# EAGLE board PiPowerRF (EAGLE 7.2.0)
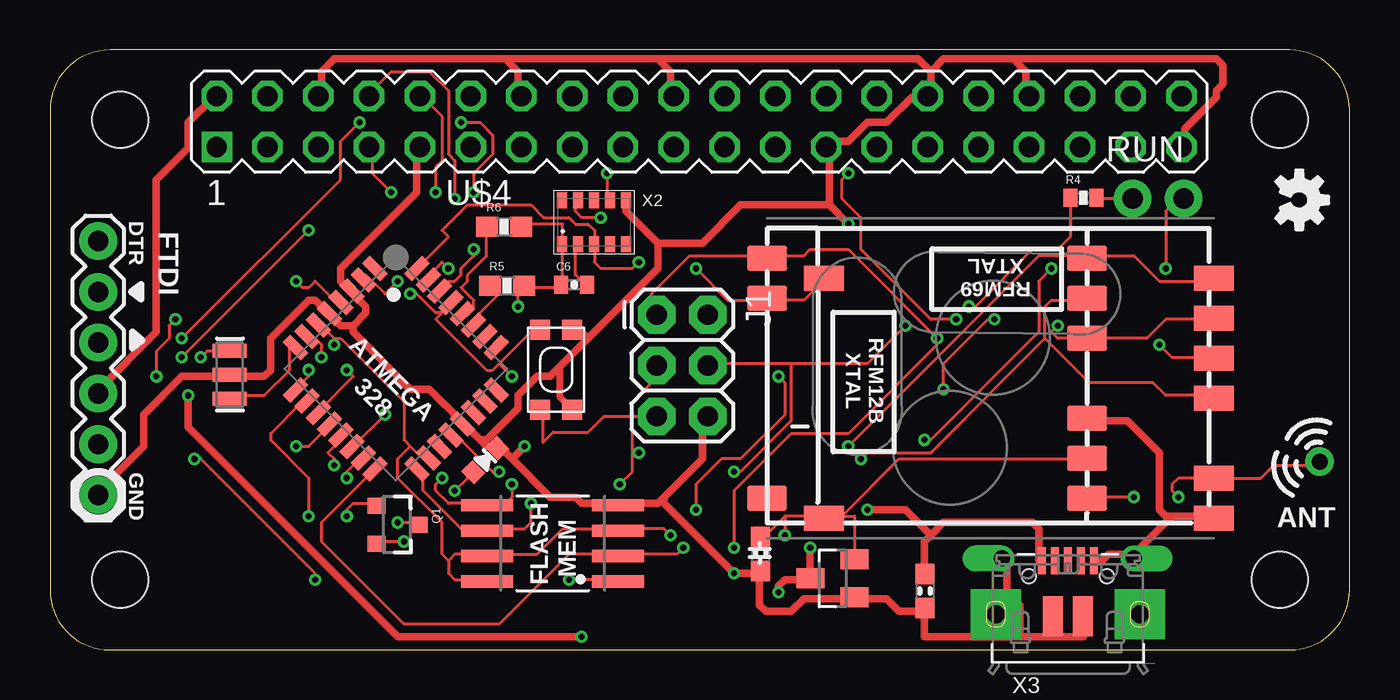
[diagram p0: board, top side]
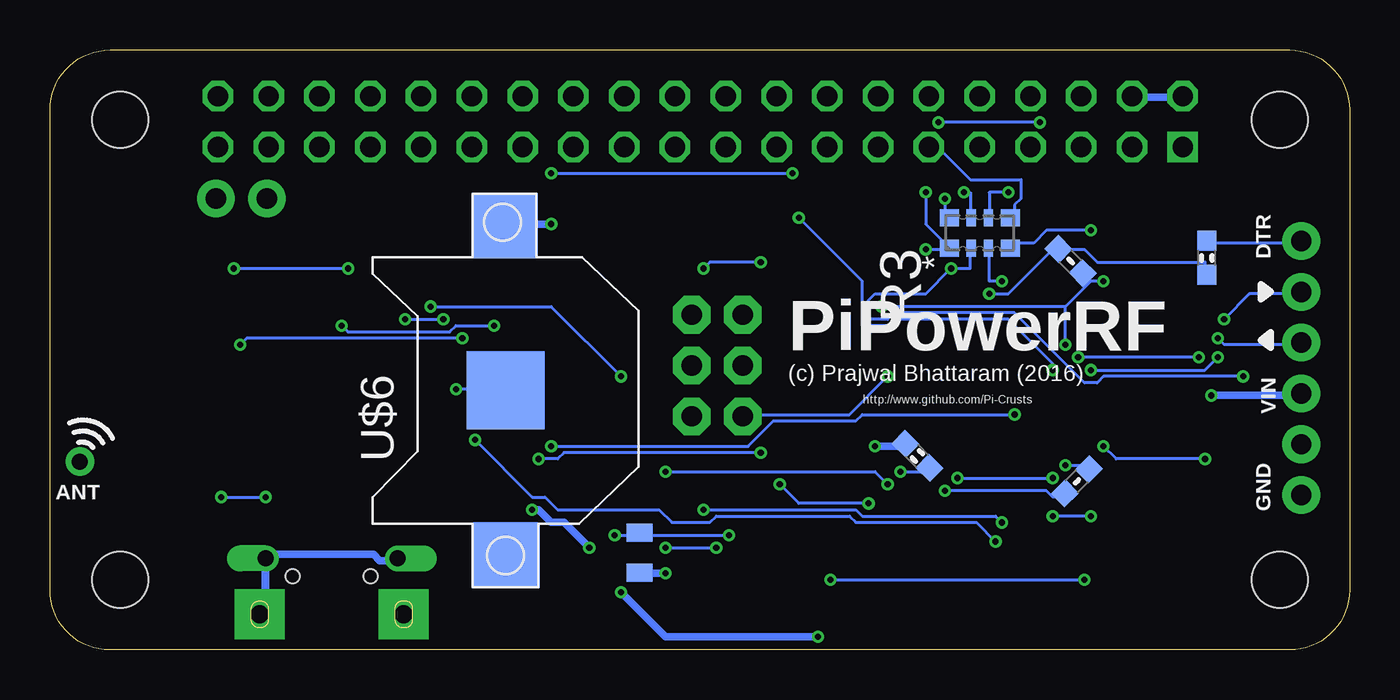
[diagram p1: board, bottom side, seen from below]

Size 65 x 30 mm. Coordinates in mm from the lower left corner, seen from the top.
Copper layers (1*16): Top 0.035mm / dielectric 1.5mm / Bottom 0.035mm
Design rules "ITEADstudio_DRC *": minimum track width 6mil, minimum drill 12mil, track to track 6mil, track to pad 6mil, pad to pad 6mil, via to via 6mil, smd to smd 0mil, copper to edge 10mil, drill to drill 10mil, minimum pad ring 10mil, minimum via ring 6mil, stop-mask expansion 2mil, vias tented up to drill 100mil, thermal gap 15mil
Net classes: 1 power: width 0.381 mm, clearance 0.254 mm
tRestrict: area 24.2,8.9 to 29,12.9; area 5.8,16.9 to 6.8,18.6; area 5.1,9.7 to 6.7,10.4
bRestrict: area 27.4,17.7 to 29.1,18.7; area 21,13.9 to 22.8,14.9; area 21.5,12.6 to 22,13.2; area 20.6,12.6 to 21.1,13.2; area 20.1,12.9 to 20.6,13.5; area 20,13.4 to 20.5,14.1; area 26.5,18.9 to 27,19.5; area 26.5,17.9 to 27,18.5; area 27.5,19.2 to 28,19.8; area 27.9,18.8 to 29,19.6

## Footprints (pad centres in the part's own frame; a part is rotated, then mirrored left to right if it is on the bottom)
TQFP32-08 = smd 1.27 x 0.533: 1 -4.293,2.8; 2 -4.293,2; 3 -4.293,1.2; 4 -4.293,0.4; 5 -4.293,-0.4; 6 -4.293,-1.2; 7 -4.293,-2; 8 -4.293,-2.8; 17 4.293,-2.8; 18 4.293,-2; 19 4.293,-1.2; 20 4.293,-0.4; 21 4.293,0.4; 22 4.293,1.2; 23 4.293,2; 24 4.293,2.8 | smd 0.533 x 1.27: 9 -2.8,-4.293; 10 -2,-4.293; 11 -1.2,-4.293; 12 -0.4,-4.293; 13 0.4,-4.293; 14 1.2,-4.293; 15 2,-4.293; 16 2.8,-4.293; 25 2.8,4.293; 26 2,4.293; 27 1.2,4.293; 28 0.4,4.293; 29 -0.4,4.293; 30 -1.2,4.293; 31 -2,4.293; 32 -2.8,4.293
0603-CAP = smd 1.016 x 0.965: 1 -0.85,0; 2 0.85,0
0805-CAP = smd 0.902 x 1.3: 1 -1,0; 2 1,0
0402-CAP = smd 0.7 x 0.9: 1 -0.65,0; 2 0.65,0
1X06 = drill 1.016 pad 1.88: 1 0,0; 2 2.54,0; 3 5.08,0; 4 7.62,0; 5 10.16,0; 6 12.7,0
SOT23 = smd 1 x 1.4: 1 -0.95,-1.1; 2 0.95,-1.1; 3 0,1.1
2X3 = drill 1.016 pad 1.88 octagon: 1 0,0; 2 0,2.54; 3 2.54,0; 4 2.54,2.54; 5 5.08,0; 6 5.08,2.54
SOT23-3 = smd 0.8 x 0.9: 1 -0.95,-1; 2 0.95,-1; 3 0,1.1
0603-RES = smd 1.016 x 0.965: 1 -0.85,0; 2 0.85,0
RESCAXE80P320X160X60-8N = smd 0.864 x 0.965: 1 -0.762,1.524; 4 -0.762,-1.524; 5 0.762,-1.524; 8 0.762,1.524 | smd 0.864 x 0.457: 2 -0.762,0.432; 3 -0.762,-0.432; 6 0.762,-0.432; 7 0.762,0.432
0402-RES = smd 0.7 x 0.9: 1 -0.65,0; 2 0.65,0
0603-RES' = smd 1.1 x 1: 1 -0.85,0; 2 0.85,0
RFM12B-MINPADS = smd 2 x 1.27: ANT 8,-6; GND 8,-2; IRQ -8,4; SCK 8,4; SDI 8,2; SDI1 -8.002,-6.001; SDO -8,6; SEL 8,6; VDD 8,-4
1X02_NO_SILK = drill 1.016 pad 1.88: 1 0,0; 2 2.54,0
KMR2 = smd 1 x 1: 1 2,0.8; 2 2,-0.8; 3 -2,0.8; 4 -2,-0.8
RFM12B-ANTENNA = drill 0.8 pad 1.422: P$1 0,0
0603-LED = smd 0.8 x 0.9: MINUS -0.85,0; PLUS 0.85,0
PIZERO_THOUGH_HOLE = drill 1.016 square: 1 8.34,25.15 | drill 1.016 octagon: 2 8.34,27.69; 3 10.88,25.15; 4 10.88,27.69; 5 13.42,25.15; 6 13.42,27.69; 7 15.96,25.15; 8 15.96,27.69; 9 18.5,25.15; 10 18.5,27.69; 11 21.04,25.15; 12 21.04,27.69; 13 23.58,25.15; 14 23.58,27.69; 15 26.12,25.15; 16 26.12,27.69; 17 28.66,25.15; 18 28.66,27.69; 19 31.2,25.15; 20 31.2,27.69; 21 33.74,25.15; 22 33.74,27.69; 23 36.28,25.15; 24 36.28,27.69; 25 38.82,25.15; 26 38.82,27.69; 27 41.36,25.15; 28 41.36,27.69; 29 43.9,25.15; 30 43.9,27.69; 31 46.44,25.15; 32 46.44,27.69; 33 48.98,25.15; 34 48.98,27.69; 35 51.52,25.15; 36 51.52,27.69; 37 54.06,25.15; 38 54.06,27.69; 39 56.6,25.15; 40 56.6,27.69 | hole 2.8: 3.5,3.5; 3.5,26.5; 61.5,26.5; 61.5,3.5
RFM69W-MINPADS = smd 2 x 1.27: ANA 8,-5; DIO0 -11.5,5; GND 8,-7; MISO 8,1; MOSI 8,3; NSS 8,5; SCK 8,-1; VDD -11.5,-7
CR1220-SMD = smd 3.2 x 3.2: +$1 -8.2,0; +$2 8.2,0 | smd 3.9 x 3.9: - 0,0
SO08WIDE = smd 0.61 x 2.6: 1 -1.905,-3.269; 2 -0.635,-3.269; 3 0.635,-3.269; 4 1.905,-3.269; 5 1.905,3.286; 6 0.635,3.286; 7 -0.635,3.286; 8 -1.905,3.286
RESONATOR-SMD = smd 0.7 x 1.7: 1 -1.2,0; 2 0,0; 3 1.2,0
MC-RTC-C3 = smd 0.5 x 0.8: P$1 -1.6,-1.1; P$2 -0.8,-1.1; P$3 0,-1.1; P$4 0.8,-1.1; P$5 1.6,-1.1; P$6 1.6,1.1; P$7 0.8,1.1; P$8 0,1.1; P$9 -0.8,1.1; P$10 -1.6,1.1
4UCONN_20329_V2 = smd 1 x 2: BASE@1 -0.75,-2; BASE@2 0.75,-2 | smd 0.4 x 1.35: D+ 0,0.775; D- -0.65,0.775; GND 1.3,0.775; ID 0.65,0.775; VBUS -1.3,0.775 | drill 0.8 pad 1.2 offset: SPRT@1 -3.3,0.9; SPRT@2 3.3,0.9 | drill 0.9 pad 2.5 square: SPRT@3 -3.6,-1.9; SPRT@4 3.6,-1.9 | hole 0.7: -1.95,0; 1.95,0

## Placement (x,y rotation side)
ATMEGA328  ATMega-328  [TQFP32-08]  17.3,14.06 315 top
C1  0.1  [0603-CAP]  7.14,19.61 90 bottom
C2  1u  [0603-CAP]  43.76,2.95 270 top
C3  10u  [0805-CAP]  35.51,4.85 270 bottom
C4  0.1  [0603-CAP]  35.53,4.8 270 top
C5  0.1  [0603-CAP]  21.62,9.7 135 bottom
C6  47pF  [0402-CAP]  26.21,18.26 0 top
FTDI  FTDI  [1X06]  2.41,7.75 90 top
IC3  MCP1703CB  [SOT23]  39.14,3.58 90 top
J1  AVR_SPI_PRG_6PTH  [2X3]  30.35,16.76 270 top
Q1  MMBT2222A  [SOT23-3]  17.35,6.27 270 top
R1  10k  [0603-RES]  13.95,19.45 135 bottom
R2  1k5  [0603-RES]  13.64,8.43 45 bottom
R3  220R  [RESCAXE80P320X160X60-8N]  18.49,20.85 90 bottom
R4  100  [0402-RES]  51.69,22.61 0 top
R5  10K  [0603-RES']  22.86,18.21 0 top
R6  10K  [0603-RES']  22.71,21.16 0 top
RFM12B  RFM12B_MINPADS  [RFM12B-MINPADS]  43.87,13.59 0 top
RUN  [1X02_NO_SILK]  54.15,22.58 0 top
SW1  SPST_TACT-KMR2  [KMR2]  25.32,14.02 90 top
U$1  RFM12B_ANTENNA  [RFM12B-ANTENNA]  63.51,9.42 340 bottom
U$2  LED0603  [0603-LED]  21.77,9.5 225 top
U$3  [OSHW-LOGO-S]  62.48,22.5 270 top
U$4  PIZERO_THROUGH_HOLE  [PIZERO_THOUGH_HOLE]  0,0 0 top
U$5  RFM69  [RFM69W-MINPADS]  50.22,13.59 0 top
U$6  [CR1220-SMD]  42.21,12.98 90 bottom
W25X40CLSNIG-ND  AT25F512BWIDE_5.3MM  [SO08WIDE]  25.15,5.33 90 top
X1  16 MHz  [RESONATOR-SMD]  8.99,13.77 270 top
X2  MC-RTC-RV-1805-C3-I2C  [MC-RTC-C3]  27.2,21.39 0 top
X3  microUSB  [4UCONN_20329_V2]  50.9,3.68 0 top

## Library data of the parts
ATMEGA328 C1-C5 R1 R2 RFM12B U$1 U$2 U$5 W25X40CLSNIG-ND = LowPowerLab
C6 = SparkFun-Capacitors
FTDI J1 RUN = SparkFun-Connectors
IC3 = linear
Q1 = SparkFun-DiscreteSemi; PROD_ID: TRANS-08049
R3 = Panasonic-EXB-ERJ; MPN: EXB38V221JV; OC_FARNELL: 2060094; OC_NEWARK: 65T9093; PACKAGE: 0603; POWERRATING: 0.063 W/element; SUPPLIER: PANASONIC; TOLERANCE: ±5 %
R4 = SparkFun-Passives
R5 R6 = SparkFun-Resistors
SW1 U$6 = adafruit
U$3 = SparkFun-Aesthetics
U$4 = pizero
X1 = SparkFun
X2 = Microcrystal-RTC
X3 = microbuilder

## Nets
3.3V: J1.2
A0: ATMEGA328.23
A1: ATMEGA328.24
A2: ATMEGA328.25
A3: ATMEGA328.26
A4_SDA: ATMEGA328.27 R5.1
A5_SCL: ATMEGA328.28 R6.1
A6: ATMEGA328.19
A7: ATMEGA328.22
AREF: ATMEGA328.20 C5.1
D0_RX: ATMEGA328.30 FTDI.4 R3.1
D1_TX: ATMEGA328.31 FTDI.5 R3.2
D2: ATMEGA328.32 RFM12B.IRQ U$5.DIO0 X2.P$3
D3: ATMEGA328.1
D4: ATMEGA328.2 R3.3
D5: ATMEGA328.9 R3.4
D6: ATMEGA328.10 Q1.1
D7: ATMEGA328.11 X2.P$9
D8: ATMEGA328.12 W25X40CLSNIG-ND.1
D9: ATMEGA328.13 R2.2
D10_SS: ATMEGA328.14 RFM12B.SEL U$5.NSS
D11_MOSI: ATMEGA328.15 J1.4 RFM12B.SDI U$5.MOSI W25X40CLSNIG-ND.5
D12_MISO: ATMEGA328.16 J1.1 RFM12B.SDO U$5.MISO W25X40CLSNIG-ND.2
D13_SCK: ATMEGA328.17 J1.3 RFM12B.SCK U$5.SCK W25X40CLSNIG-ND.6
GND [power]: ATMEGA328.3 ATMEGA328.5 ATMEGA328.21 C2.2 C3.2 C4.2 C5.2 FTDI.1 IC3.1 J1.6 RFM12B.GND SW1.2 SW1.4 U$2.MINUS U$4.6 U$4.9 U$4.14 U$4.20 U$4.25 U$4.30 U$4.34 U$4.39 U$5.GND U$6.+$2 W25X40CLSNIG-ND.4 X1.2 X2.P$6 X3.BASE@1 X3.BASE@2 X3.GND X3.SPRT@1 X3.SPRT@2 X3.SPRT@3 X3.SPRT@4
GPIO4: R3.6 U$4.7
GPIO17: R3.5 U$4.11
N$1: ATMEGA328.7 X1.1
N$2: R2.1 U$2.PLUS
N$3: RFM12B.ANT U$1.P$1 U$5.ANA
N$4: R4.2 RUN.1
N$5: Q1.2 RUN.2
N$6: U$6.- X2.P$7
N$7: Q1.3 R4.1
N$8: C6.2 X2.P$2
N$20: C1.2 FTDI.6
N$21: ATMEGA328.8 X1.3
PI_RXI: R3.7 U$4.10
PI_TXO: R3.8 U$4.8
PWR [power]: C2.1 FTDI.3 IC3.3 U$4.2 U$4.4 X3.VBUS
RST: ATMEGA328.29 C1.1 J1.5 R1.2 SW1.1 SW1.3
SCL: X2.P$4
SDA: X2.P$5
VCC: ATMEGA328.4 ATMEGA328.6 ATMEGA328.18 C3.1 C4.1 C6.1 IC3.2 R1.1 R5.2 R6.2 RFM12B.VDD U$5.VDD W25X40CLSNIG-ND.3 W25X40CLSNIG-ND.7 W25X40CLSNIG-ND.8 X2.P$1

## Tracks (layer width: path | path; a pad name or v marks a point on that pad's centre or on a via)
A4_SDA
  Top 0.152: R5.1 22.15,18.12 22.47,17.81 21.2,16.54 ATMEGA328.27
A5_SCL
  Top 0.152: R6.1 21.83,20.98 21.83,19.71 20.88,18.76 20.88,18.44 20.56,18.12 21.2,17.49 21.2,17.17 20.88,16.85 ATMEGA328.28
AREF  (via drill 0.3)
  Top 0.152: v22.47,8.92 22.15,8.92 20.24,10.82 ATMEGA328.20
  Bottom 0.152: v22.47,8.92 21.2,8.92 C5.1
D0_RX  (via drill 0.3)
  Top 0.152: v21.2,20.03 21.2,19.71 20.56,19.08 20.56,18.76 20.24,18.44 19.93,18.44 19.61,18.12 ATMEGA328.30 | v21.2,22.89 21.2,23.84 22.15,24.79 22.15,25.74 21.51,26.38 v20.56,26.38 | v15.48,26.38 14.53,25.43 14.53,23.52 v6.59,15.58
  Bottom 0.152: v21.2,20.03 20.24,20.03 R3.1 20.24,20.35 21.2,21.3 v21.2,22.89 | v15.48,26.38 v20.56,26.38 | v6.59,15.58 6.27,15.27 2.46,15.27 FTDI.4
D1_TX  (via drill 0.3)
  Top 0.152: v19.93,19.08 19.61,19.39 18.97,18.76 ATMEGA328.31 | v5.32,13.68 5.32,14.95 5.96,15.58 5.96,16.22 v6.27,16.54
  Bottom 0.152: R3.2 18.97,20.03 18.97,19.08 v19.93,19.08 21.2,17.81 23.74,17.81 24.05,17.49 24.05,16.54 23.1,16.54 22.78,16.85 16.75,16.85 13.26,13.36 12.62,13.36 12.31,13.68 v5.32,13.68 | v6.27,16.54 5,17.81 2.46,17.81 FTDI.5
D2  (via drill 0.3)
  Top 0.152: U$5.DIO0 38.66,18.76 38.34,18.44 38.34,18.12 37.71,17.49 36.12,17.49 RFM12B.IRQ 35.8,17.49 33.9,17.49 v32.31,19.08 | ATMEGA328.32 18.66,19.39 19.93,20.66 19.61,20.98 20.88,22.25 24.05,22.25 24.69,21.62 25.96,21.62 26.28,21.3 26.91,21.3 27.23,20.98 27.23,20.35 X2.P$3 27.23,20.03 27.23,19.39 27.55,19.08 29.13,19.08 v29.45,19.39
  Bottom 0.152: v32.31,19.08 31.99,19.39 v29.45,19.39
D4  (via drill 0.3)
  Top 0.152: v17.39,18.44 16.75,17.81 15.8,18.76 ATMEGA328.2
  Bottom 0.152: v17.39,18.44 18.02,18.44 18.02,20.03 R3.3
D5  (via drill 0.3)
  Top 0.152: v6.59,14.63 v12.94,20.98 | v12.94,14 12.94,13.68 12.31,13.04 ATMEGA328.9
  Bottom 0.152: v12.94,20.98 15.16,20.98 15.8,20.35 16.75,20.35 R3.4 | v6.59,14.63 7.23,14 v12.94,14
D6  (via drill 0.3)
  Top 0.152: v14.85,6.69 14.85,7.01 15.16,7.33 16.12,7.33 Q1.1 | v12.94,6.69 12.94,8.6 11.04,10.5 11.04,10.82 12.62,12.41 ATMEGA328.10
  Bottom 0.152: v12.94,6.69 v14.85,6.69
D7  (via drill 0.3)
  Top 0.152: v27.55,21.62 26.59,21.62 26.28,21.93 26.28,22.25 X2.P$9 | v14.85,14 15.16,13.68 13.58,12.09 ATMEGA328.11
  Bottom 0.152: v27.55,21.62 24.37,18.44 24.37,16.22 22.78,16.22 22.47,16.54 17.07,16.54 14.85,14.31 v14.85,14
D8  (via drill 0.3)
  Top 0.152: v12.31,10.19 12.94,10.19 13.89,11.14 ATMEGA328.12 | v7.23,9.55 7.54,9.55 13.26,3.84 v13.26,3.52 | v25.96,3.52 28.18,3.52 W25X40CLSNIG-ND.1
  Bottom 0.152: v12.31,10.19 11.67,9.55 v7.23,9.55 | v25.96,3.52 v13.26,3.52
D9  (via drill 0.3)
  Top 0.152: v14.21,9.23 14.21,9.55 13.89,9.87 14.53,10.5 ATMEGA328.13
  Bottom 0.152: v14.21,9.23 13.26,9.23 R2.2
D10_SS  (via drill 0.3)
  Top 0.152: v16.75,11.77 15.16,10.19 ATMEGA328.14 | v39.93,10.19 49.45,19.71 51.68,19.71 RFM12B.SEL 51.99,19.71 54.22,19.71 55.49,18.44 58.03,18.44 U$5.NSS
  Bottom 0.152: v16.75,11.77 24.37,11.77 24.69,11.46 28.82,11.46 30.09,10.19 v39.93,10.19
D11_MOSI  (via drill 0.3)
  Top 0.152: v14.85,8.6 14.85,8.92 15.48,9.55 ATMEGA328.15 | v19.61,8.6 19.29,8.28 19.29,7.96 19.93,7.33 21.83,7.33 W25X40CLSNIG-ND.5 22.15,7.33 22.78,7.33 23.1,7.65 v23.1,8.28 | U$5.MOSI 58.03,16.54 55.8,16.54 54.85,15.58 51.99,15.58 RFM12B.SDI 51.68,15.58 50.41,15.58 50.09,15.9 v50.41,16.22 | 37.07,14.31 40.88,14.31 v42.79,16.22 | 37.07,14.31 32.94,14.31 J1.4 | v34.21,8.92 34.53,8.92 37.07,11.46 37.07,14.31
  Bottom 0.152: v19.61,8.6 v14.85,8.6 | v42.79,16.22 44.69,16.22 45.01,15.9 50.09,15.9 v50.41,16.22 | v23.1,8.28 23.74,8.92 v34.21,8.92
D12_MISO  (via drill 0.3)
  Top 0.152: ATMEGA328.16 16.12,8.92 13.58,6.38 13.58,5.42 17.7,1.3 22.47,1.3 25.96,4.79 28.18,4.79 W25X40CLSNIG-ND.2 28.5,4.79 31.36,4.79 v31.67,5.11 | J1.1 30.09,16.85 30.09,17.81 31.99,19.71 35.8,19.71 RFM12B.SDO 36.12,19.71 37.71,19.71 38.02,20.03 39.93,20.03 v44.37,15.58 44.37,15.27 39.93,10.82 37.07,10.82 34.21,7.96 v34.21,5.11 | v55.49,15.27 56.12,14.63 58.03,14.63 U$5.MISO
  Bottom 0.152: v55.49,15.27 55.17,15.58 v44.37,15.58 | v34.21,5.11 v31.67,5.11
D13_SCK  (via drill 0.3)
  Top 0.152: 49.77,15.58 49.77,17.17 50.09,17.49 51.68,17.49 RFM12B.SCK | 49.77,15.58 51.99,13.36 55.17,13.36 55.8,12.73 58.03,12.73 U$5.SCK | ATMEGA328.17 18.66,8.92 18.66,7.96 20.56,6.06 21.83,6.06 W25X40CLSNIG-ND.6 22.15,6.06 23.74,6.06 24.05,6.38 v24.05,7.33 | 29.13,9.87 29.13,8.92 v28.5,8.28 | 29.13,9.87 29.13,12.41 30.09,13.36 30.09,14 J1.3 | 49.77,15.58 44.06,9.87 40.88,9.87 v40.56,9.55 | 29.13,9.87 v29.45,9.87
  Bottom 0.152: v28.5,8.28 27.55,7.33 v24.05,7.33 | v40.56,9.55 39.61,9.55 39.29,9.87 v29.45,9.87
GND  (via drill 0.3)
  Top 0.356: SW1.4 25.51,12.63 25.51,14.19
  Top 0.381: 44.06,28.92 44.06,27.97 U$4.30 43.74,27.65 43.1,27.65 41.83,26.38 40.88,26.38 39.93,25.43 38.98,25.43 U$4.25 38.98,25.11 38.98,22.25 | 44.06,28.92 44.69,29.55 48.18,29.55 | 48.18,29.55 48.82,28.92 48.82,27.97 U$4.34 | 48.18,29.55 58.34,29.55 58.66,29.24 58.66,28.28 58.34,27.97 58.34,27.65 56.76,26.06 56.76,25.43 U$4.39 | 22.78,29.55 14.21,29.55 13.58,28.92 13.58,27.97 U$4.6 | 22.78,29.55 23.42,28.92 23.42,27.97 U$4.14 | 30.4,29.55 31.04,28.92 31.04,27.97 U$4.20 | 22.78,29.55 30.4,29.55 | 44.06,28.92 43.42,29.55 30.4,29.55 | 15.16,16.22 14.53,16.22 14.21,16.54 ATMEGA328.5 13.89,16.85 13.26,17.49 12.94,17.49 11.04,15.58 11.04,14 10.72,13.68 9.13,13.68 X1.2 8.81,13.68 6.59,13.68 4.69,11.77 4.69,10.19 2.46,7.96 FTDI.1 | 15.16,16.22 15.8,16.85 15.8,17.17 15.16,17.81 ATMEGA328.3 14.85,18.12 14.53,18.44 14.53,19.08 18.34,22.89 18.34,25.11 U$4.9 | 30.4,20.35 28.82,21.93 28.82,22.25 X2.P$6 | 30.4,20.35 30.4,19.08 26.91,15.58 | 26.91,15.58 26.28,16.22 SW1.2 | v39.93,21.3 38.98,22.25 | 30.4,20.35 32.63,20.35 34.53,22.25 38.98,22.25 | 21.51,10.5 20.88,11.14 ATMEGA328.21 20.56,11.46 18.97,13.04 18.02,13.04 15.16,15.9 15.16,16.22 | 21.51,10.5 21.83,10.19 22.15,10.19 U$2.MINUS 22.47,10.19 23.1,9.55 | 23.1,9.55 v23.74,10.19 | 23.1,9.55 25.01,7.65 26.28,7.65 26.59,7.33 28.18,7.33 W25X40CLSNIG-ND.4 28.5,7.33 30.4,7.33 30.72,7.65 | 30.72,7.65 32.63,9.55 32.63,11.46 J1.6 | X3.GND 52.31,4.47 52.63,4.47 52.95,4.79 53.9,4.79 X3.SPRT@2 54.22,4.79 56.12,6.69 | 56.12,6.69 58.03,6.69 U$5.GND | 56.12,6.69 55.8,6.69 55.49,7.01 55.49,9.87 53.9,11.46 51.99,11.46 RFM12B.GND | 48.5,0.66 48.5,2.25 47.87,2.88 47.87,4.47 X3.SPRT@1
  Top 0.381: 50.09,0.66 50.09,1.61 X3.BASE@1 | 50.09,0.66 51.68,0.66 51.68,1.61 X3.BASE@2 | 35.48,3.84 v34.21,3.84 30.72,7.33 30.72,7.65 | 43.74,1.93 42.47,1.93 41.83,2.57 40.25,2.57 IC3.1 39.93,2.57 37.71,2.57 37.07,1.93 35.8,1.93 35.48,2.25 35.48,3.84 | 35.48,3.84 C4.2 | 48.5,0.66 43.74,0.66 43.74,1.93 | 48.5,0.66 50.09,0.66 | 43.74,1.93 C2.2 | 48.5,0.66 X3.SPRT@3 | 26.91,15.58 25.51,14.19 25.01,13.68 24.37,13.68 23.42,12.73 23.42,12.09 21.83,10.5 21.51,10.5
  Bottom 0.381: v39.93,21.3 42.15,21.3 U$6.+$2 | v23.74,10.19 22.47,10.19 C5.2 | v34.21,3.84 35.48,3.84 C3.2 | X3.SPRT@2 53.9,4.79 48.82,4.79 48.5,4.47 47.87,4.47 X3.SPRT@1
  Bottom 0.406: X3.SPRT@4 54.2,1.78 X3.SPRT@2
GPIO4  (via drill 0.3)
  Top 0.152: v17.07,22.89 16.12,23.84 16.12,25.11 U$4.7
  Bottom 0.152: v17.07,22.89 18.02,22.89 18.02,21.62 R3.6
GPIO17
  Bottom 0.152: R3.5 16.75,21.62 16.75,22.25 16.43,22.57 16.43,23.52 18.97,23.52 20.56,25.11 20.88,25.11 U$4.11
N$1  (via drill 0.3)
  Top 0.152: v13.58,14.63 13.58,15.27 13.26,15.58 12.94,15.58 ATMEGA328.7 | v7.54,14.63 7.86,14.95 8.81,14.95 X1.1
  Bottom 0.152: v7.54,14.63 v13.58,14.63
N$2  (via drill 0.3)
  Top 0.152: v20.24,7.96 20.88,8.6 20.88,8.92 U$2.PLUS
  Bottom 0.152: v20.24,7.96 15.16,7.96 14.85,7.65 14.53,7.65 R2.1
N$3  (via drill 0.3)
  Top 0.152: v54.22,7.65 51.99,7.65 RFM12B.ANT | v56.44,7.65 56.12,7.96 56.12,8.28 56.44,8.6 58.03,8.6 U$5.ANA 58.34,8.6 60.57,8.6 61.2,9.23 63.42,9.23 U$1.P$1
  Bottom 0.152: v56.44,7.65 v54.22,7.65
N$4
  Top 0.152: R4.2 52.63,22.57 53.9,22.57 RUN.1
N$5  (via drill 0.3)
  Top 0.152: v17.7,5.42 16.43,5.42 Q1.2 | v43.74,10.5 44.06,10.5 49.45,15.9 49.45,18.44 v50.09,19.08 | v55.8,19.08 55.8,21.93 56.44,22.57 RUN.2
  Bottom 0.152: v17.7,5.42 18.66,6.38 24.69,6.38 25.01,6.69 31.67,6.69 31.99,6.38 33.9,6.38 34.53,7.01 39.61,7.01 40.25,7.65 40.88,7.65 v43.74,10.5 | v55.8,19.08 v50.09,19.08
N$6  (via drill 0.3)
  Top 0.152: v27.86,23.84 27.86,22.57 X2.P$7 | v39.93,23.84 39.61,23.52 39.61,22.57 40.56,21.62 40.56,20.03 44.06,16.54 v45.33,16.54 | v47.23,16.54 46.91,16.54 44.69,14.31 v44.69,13.04
  Bottom 0.152: v39.93,23.84 v27.86,23.84 | v47.23,16.54 v45.33,16.54 | v44.69,13.04 42.47,13.04 U$6.-
N$7  (via drill 0.3)
  Top 0.152: v17.39,6.38 18.34,6.38 Q1.3 | v32.31,7.01 32.31,8.28 33.58,9.55 34.53,9.55 36.75,11.77 36.75,13.36 v36.44,13.68 | v45.96,17.17 46.28,17.17 49.14,20.03 50.41,20.03 51.04,20.66 51.04,22.57 R4.1
  Bottom 0.152: v17.39,6.38 17.7,6.69 24.37,6.69 24.69,7.01 v32.31,7.01 | v36.44,13.68 39.93,17.17 v45.96,17.17
N$8
  Top 0.152: X2.P$2 26.28,20.03 26.28,18.76 26.59,18.44 C6.2
N$20
  Bottom 0.152: C1.2 6.91,20.35 2.46,20.35 FTDI.6
N$21
  Top 0.152: ATMEGA328.8 11.99,15.27 11.99,14 10.72,12.73 9.13,12.73 X1.3
PI_RXI  (via drill 0.3)
  Top 0.152: v19.29,22.89 19.29,24.16 19.61,24.47 19.61,26.7 18.66,27.65 U$4.10
  Bottom 0.152: v19.29,22.89 18.97,22.89 18.97,21.62 R3.7
PI_TXO  (via drill 0.3)
  Top 0.152: v20.24,22.57 20.24,24.47 19.93,24.79 19.93,27.97 18.97,28.92 17.07,28.92 16.12,27.97 U$4.8
  Bottom 0.152: v20.24,22.57 20.24,21.62 R3.8
PWR  (via drill 0.3)
  Top 0.381: 44.06,5.74 44.69,6.38 49.14,6.38 49.45,6.06 49.45,4.47 X3.VBUS | 44.06,5.74 43.74,5.42 43.74,3.84 C2.1 | v38.02,5.11 38.02,3.84 IC3.3 38.02,3.52 36.75,3.52 36.44,3.2 v36.44,2.88 | v40.88,7.01 42.79,7.01 44.06,5.74 | FTDI.3 2.46,13.04 5.32,15.9 5.32,23.52 6.91,25.11 6.91,26.38 8.18,27.65 U$4.2 | v26.59,0.66 17.39,0.66 6.91,11.14 v6.91,12.73
  Bottom 0.381: v38.02,5.11 39.29,6.38 39.93,6.38 40.56,7.01 v40.88,7.01 | U$4.2 8.5,27.65 10.72,27.65 U$4.4 | v36.44,2.88 34.21,0.66 v26.59,0.66 | v6.91,12.73 2.46,12.73 FTDI.3
RST  (via drill 0.3)
  Top 0.152: 22.47,14.31 22.15,14 21.83,14 19.29,16.54 19.61,16.85 | 22.47,14.31 24.05,15.9 24.37,15.9 SW1.1 | 19.61,16.85 19.93,17.17 ATMEGA328.29 | v23.1,13.68 22.47,14.31 | v18.02,17.81 18.34,17.81 19.29,16.85 19.61,16.85 | SW1.3 24.64,12.02 24.64,10.36 25.17,10.9 26.92,10.9 27.71,11.68 J1.5
  Bottom 0.152: C1.1 7.23,19.08 7.23,19.39 12.62,19.39 13.26,20.03 14.53,20.03 R1.2 14.85,20.03 17.07,17.81 v18.02,17.81 | v23.1,13.68 25.01,11.77 30.09,11.77 J1.5
VCC  (via drill 0.3)
  Top 0.152: R6.2 23.74,21.3 25.64,21.3 25.64,20.35 X2.P$1 25.64,20.03 25.64,18.44 C6.1 25.32,18.12 23.74,18.12 R5.2 23.42,18.12 v23.42,17.17 | v12.31,18.44 12.62,18.12 12.94,18.12 13.26,18.44 14.53,17.17 ATMEGA328.4 | 18.02,10.19 17.7,10.5 17.7,12.41 14.53,15.58 14.21,15.58 | 18.02,10.19 18.34,9.87 18.66,9.87 ATMEGA328.18 | 14.21,15.58 13.58,16.22 ATMEGA328.6 | 14.21,15.58 v14.21,15.27 | 19.93,4.47 19.93,3.84 20.24,3.52 21.83,3.52 W25X40CLSNIG-ND.8 | 19.93,4.47 20.24,4.79 21.83,4.79 W25X40CLSNIG-ND.7 22.15,4.79 24.37,4.79 25.64,6.06 28.18,6.06 W25X40CLSNIG-ND.3 28.5,6.06 30.72,6.06 v31.04,5.74 | 36.75,6.69 35.8,5.74 C4.1 | 36.75,6.69 38.66,6.69 U$5.VDD | 36.75,6.69 v36.75,5.74 | 39.61,6.69 38.98,6.69 U$5.VDD | 39.61,6.69 40.25,6.69 40.25,4.79 IC3.2 | 39.61,6.69 42.47,9.55 51.68,9.55 RFM12B.VDD | 39.61,6.69 U$5.VDD | 18.02,10.19 17.39,9.55 17.39,8.6 19.61,6.38 19.61,4.79 19.93,4.47
  Bottom 0.152: 12.94,18.44 13.26,18.76 R1.1 | v12.31,18.44 12.94,18.44 | 14.21,17.17 12.94,18.44 | v14.21,15.27 14.21,17.17 | 14.21,17.17 v23.42,17.17 | v36.75,5.74 35.8,5.74 C3.1 35.48,5.74 v31.04,5.74

## Text on the board
tPlace: RFM69 / XTAL | RFM12B / XTAL
tDocu: REG
_tsilk: DTR | FTDI | ATMEGA / 328 | GND | FLASH | MEM | ANT
_bsilk: DTR | PiPowerRF | (c) Prajwal Bhattaram (2016) | VIN | http://www.github.com/Pi-Crusts | ANT | GND